# Altium PCB sensores_0v1.PcbDoc
Units mil, origin at the board's own origin, x right, y up, seen from the top; angles counter-clockwise.
Board outline 3937.01 x 3937.01 mil, 2 copper layers (Top Layer, Bottom Layer); 157 components, 106 nets, 497 pads, 123 vias.
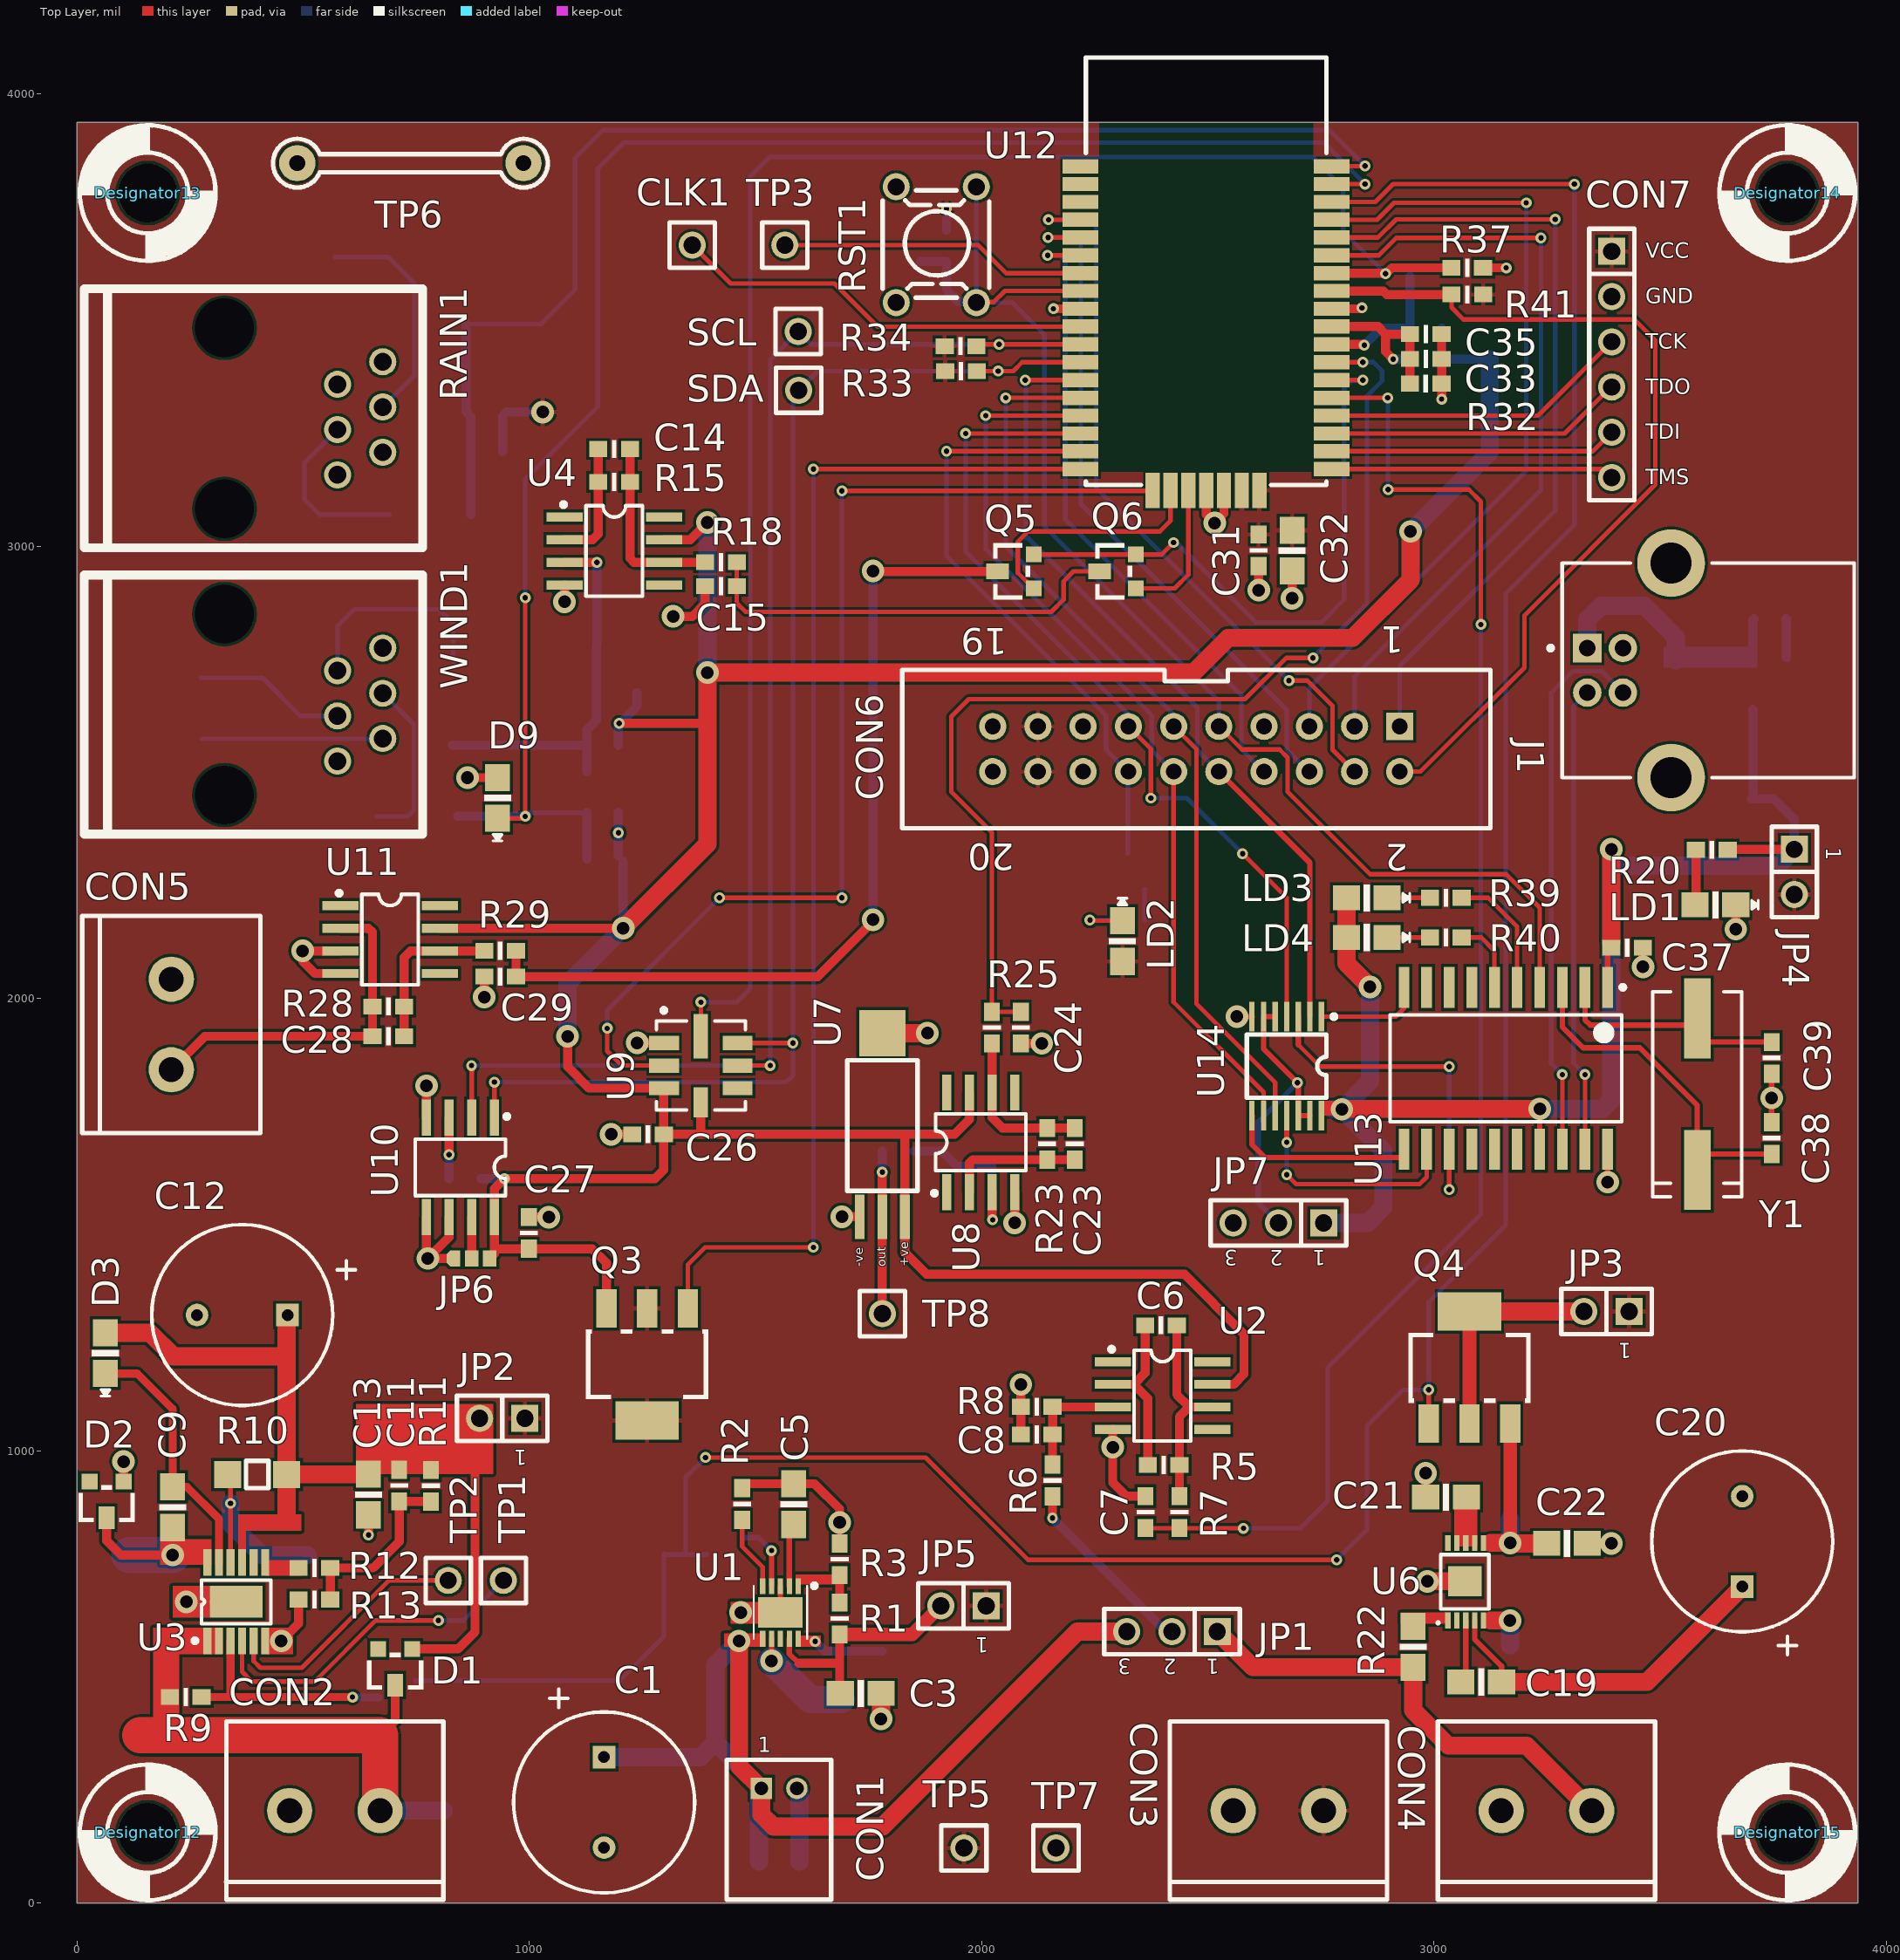
[diagram p0: Top Layer view]
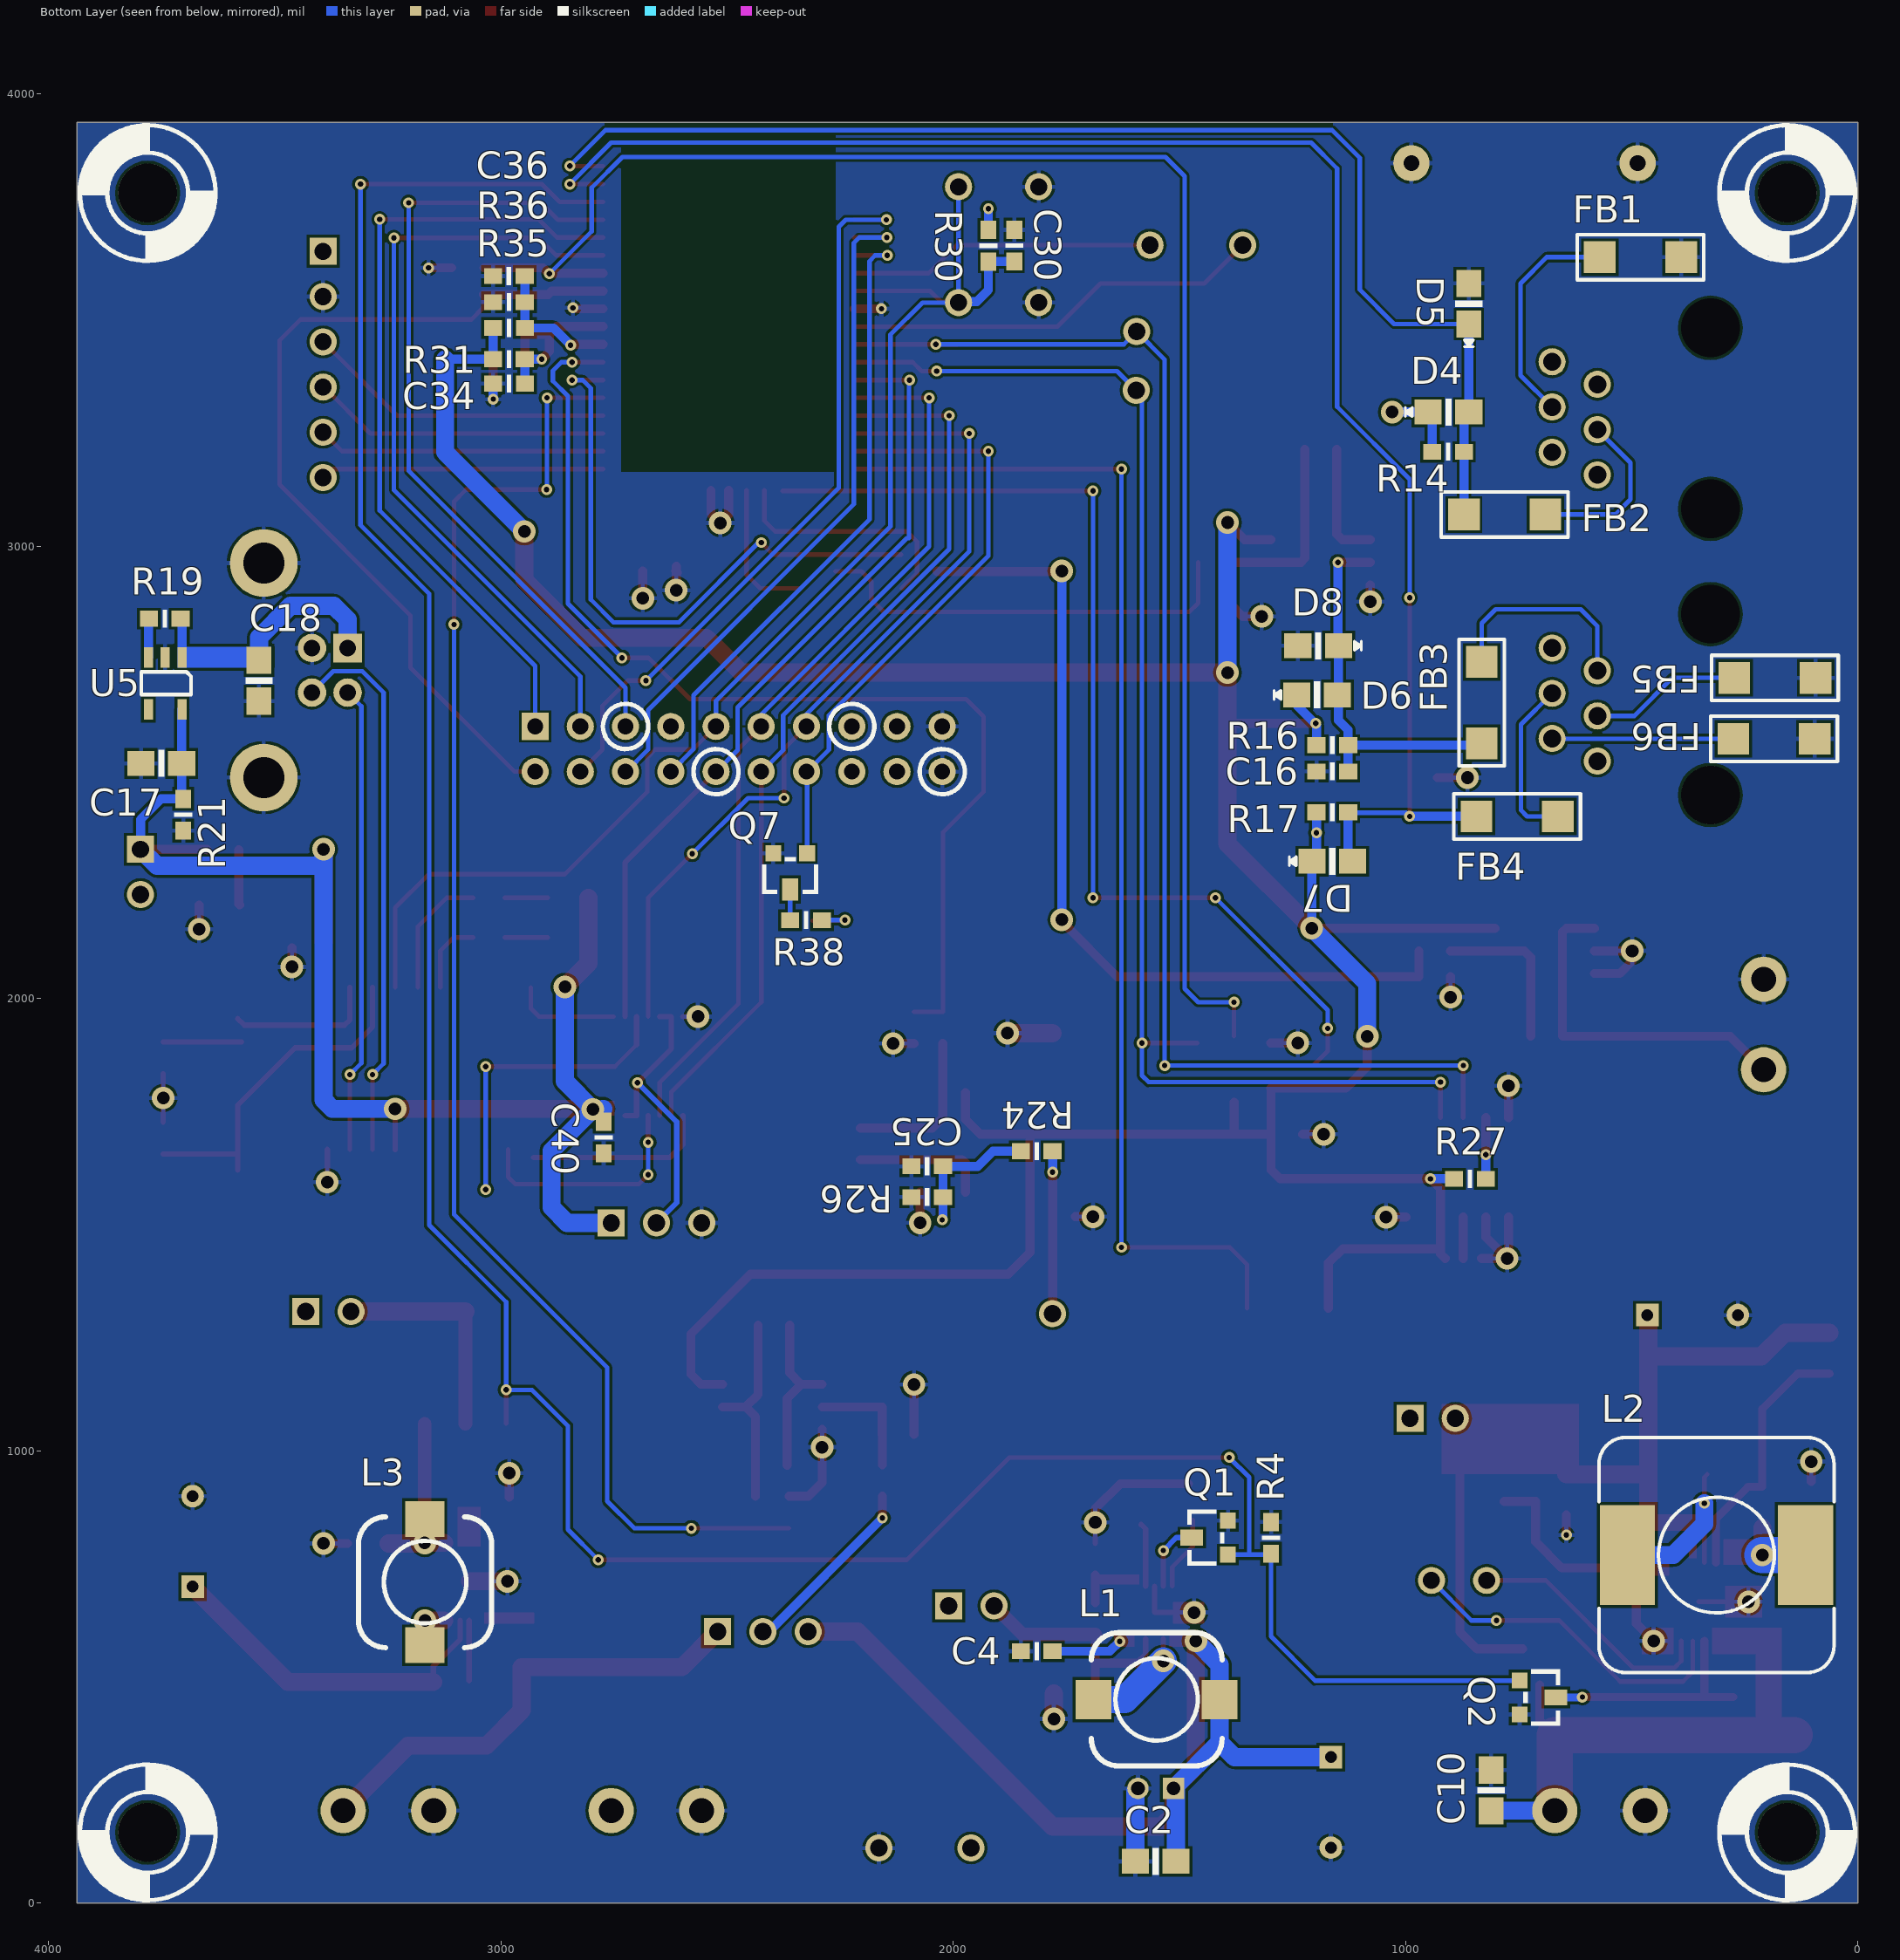
[diagram p1: Bottom Layer view, seen from below]

## Layer stack, top to bottom
Top Layer: signal copper 1.4
Dielectric: core 12.6, FR-4, Dk 4.8
Bottom Layer: signal copper 1.4

## Board outline
0,0 0,3937.01 3937.01,3937.01 3937.01,0 0,0

## Design rules (kind name [scope] priority, off if disabled: settings)
Clearance [All] p1: gap=6
HoleSize [All] p1: absolutevalues=TRUE maxlimit=100 minlimit=12 maxpercent=80.000 minpercent=20.000
PolygonConnect [All] p1: connectstyle=Relief reliefconductorwidth=10 reliefentries=4 polygonreliefangle="90 Angle"
RoutingVias [All] p1: holewidth=20 width=30 viastyle="Through Hole" minholewidth=12 minwidth=24 maxholewidth=28 maxwidth=50
SilkscreenOverComponentPads [All] p1: minsilkscreentomaskgap=10
SolderMaskExpansion [All] p1: expansion=4
Width [All] p1: maxlimit=100 minlimit=6 preferedwidth=10
26 further rules are at their usual default settings.

## Classes and differential pairs
component class U_Pressure: C26 U9
component class U_Humidity: C23 C24 C25 R23 R24 R25 R26 TP8 U7 U8
component class U_Digital: 1 C30 C31 C32 C33 C34 C35 C36 C37 C38 C39 C40 CLK1 CON6 CON7 JP7 LD2 LD3 LD4 Q5 Q6 Q7 R30 R31 R32 R33 R34 R35 R36 R37 R38 R39 R40 R41 RST1 SCL SDA TP3 U12 U13 U14 Y1
component class U_Connectors: C14 C15 C16 C17 C18 CON3 D4 D5 D6 D7 D8 D9 FB1 FB2 FB3 FB4 FB5 FB6 J1 JP2 JP3 JP4 JP5 LD1 Q3 R14 R15 R16 R17 R18 R19 R20 R21 RAIN1 TP5 TP6 TP7 U4 U5 WIND1
component class U_UV: C28 C29 CON5 R28 R29 U11
component class U_Temperature: C27 JP6 R27 U10
component class U_EnergyHarvester: C19 C20 C21 C22 CON4 L3 Q4 R22 U6
component class U_Charger: C9 C10 C11 C12 C13 CON2 D1 D2 D3 L2 Q2 R9 R10 R11 R12 R13 TP1 TP2 U3
component class U_Boost: C1 C2 C3 C4 C5 C6 C7 C8 CON1 JP1 L1 Q1 R1 R2 R3 R4 R5 R6 R7 R8 U1 U2

## Components (designator, comment, footprint, x,y, rotation, side; value= is the part's Value field where it differs from the comment)
C1 "100uF" RADIAL-5MM 1165.35,322.83 r270 top
C2 "10uF" 0805 1597.44,92.52 r180 bottom
C3 "10uF" 0805 1777.56,463.58 r180 top
C4 "1uF" 0603 1850.39,557.09 r180 bottom
C5 "10uF" 0805 1584.65,927.17 r270 top
C6 "47pF" 0603 2361.22,1277.56 r0 top
C7 "100pF" 0603 2362.2,899.61 r270 top
C8 "100nF" 0603 2086.61,1036.42 r0 top
C9 "10uF" 0805 211.61,920.28 r270 top
C10 "10uF" 0805 811.02,294.29 r270 bottom
C11 "20pF" 0603 712.6,888.23 r90 top
C12 "100uF" RADIAL-5MM 465.55,1300.2 r180 top
C13 "10uF" 0805 644.68,858.27 r90 top
C14 "47pF" 0603 1152.56,3214.57 r0 top
C15 "100pF" 0603 1388.78,2911.42 r0 top
C16 "100pF" 0603 1196.97,2501.97 r180 bottom
C17 "1uF" 0805 3795.28,2519.69 r180 bottom
C18 "4.7uF" 0805 3534.45,2657.48 r90 bottom
C19 "1uF" 0805 3059.06,489.17 r0 top
C20 "100uF" RADIAL-5MM 3681.1,699.8 r90 top
C21 "4.7uF" 0805 2981.3,897.64 r0 top
C22 "10uF" 0805 3338.58,795.28 r180 top
C23 "47pF" 0603 2205.71,1643.7 r90 top
C24 "100pF" 0603 2086.61,1900.59 r90 top
C25 "100pF" 0603 2092.52,1628.94 r180 bottom
C26 "100nF" 0603 1227.36,1699.8 r0 top
C27 "100nF" 0603 999.02,1516.73 r270 top
C28 "47pF" 0603 653.54,1916.34 r0 top
C29 "100pF" 0603 900.59,2048.23 r0 top
C30 "100nF" 0603 1864.86,3699.15 r270 bottom
C31 "100nF" 0603 2612.2,2955.71 r90 top
C32 "10uF" 0805 2686.02,2944.88 r90 top
C33 "100nF" 0603 3016.51,3413.95 r180 top
C34 "100pF" 0603 3016.73,3359.25 r180 bottom
C35 "1uF" 0603 3016.73,3468.5 r180 top
C36 "100nF" 0603 3017.07,3596.93 r180 bottom
C37 "100nF" 0603 3461.61,2112.2 r180 top
C38 "27pF" 0603 3746.06,1726.38 r270 top
C39 "27pF" 0603 3746.06,1833.66 r90 top
C40 "1uF" 0603 2772.64,1657.48 r90 bottom
CLK1 "Test Point" TERMINAL 1360.24,3665.35 r90 top
CON1 "2P" JST-2MM 1512.8,253.94 r0 top
CON2 "2P" INTERLOCK2-5MM-FIXED 670.28,204.72 r180 top
CON3 "2P" INTERLOCK2-5MM-FIXED 2755.91,204.72 r180 top
CON4 "2P" INTERLOCK2-5MM-FIXED 3348.43,204.72 r180 top
CON5 "2P" INTERLOCK2-5MM-FIXED 208.66,1842.52 r90 top
CON6 "20P" IDC-20 2924.21,2601.38 r180 top
CON7 "6P" SIP-6-JTAG 3392.72,3651.57 r270 top
D1 "BAT54" SOT-23@AK 741.14,562.01 r180 top
D2 "BAT54" SOT-23@AK 103.35,932.09 r180 top
D3 "MCL4148" 0805@DIODE 62.99,1260.83 r270 top
D4 "MCL4148" 0805@DIODE 860.24,3296.26 r0 bottom
D5 "MCL4148" 0805@DIODE 860.24,3580.71 r270 bottom
D6 "MCL4148" 0805@DIODE 1150.59,2671.26 r0 bottom
D7 "MCL4148" 0805@DIODE 1117.13,2303.15 r0 bottom
D8 "MCL4148" 0805@DIODE 1238.19,2779.53 r180 bottom
D9 "MCL4148" 0805@DIODE 930.12,2488.19 r270 top
Designator12 "Comment" NPTH-3MM 156.5,156.5 r0 top
Designator13 "Comment" NPTH-3MM 156.5,3780.51 r270 top
Designator14 "Comment" NPTH-3MM 3780.51,3780.51 r180 top
Designator15 "Comment" NPTH-3MM 3780.51,156.5 r90 top
FB1 "150Z_100MHz" 1806 390.75,3638.78 r0 bottom
FB2 "150Z_100MHz" 1806 871.06,3069.88 r180 bottom
FB3 "150Z_100MHz" 1806 831.69,2744.09 r270 bottom
FB4 "150Z_100MHz" 1806 663.39,2402.56 r0 bottom
FB5 "150Z_100MHz" 1806 273.62,2708.66 r180 bottom
FB6 "150Z_100MHz" 1806 275.59,2573.82 r180 bottom
J1 "440119-4" 440119 3377.95,2725.39 r0 top
JP1 "3P" SIP-3 2520.67,600.39 r180 top
JP2 "2P" SIP-2 990.16,1071.85 r180 top
JP3 "2P" SIP-2 3431.1,1308.04 r180 top
JP4 "2P" SIP-2 3796.26,2329.72 r270 top
JP5 "2P" SIP-2 2009.84,657.48 r180 top
JP6 "3P" SOLDER-3-0603 837.6,1425.2 r0 top
JP7 "3P" SIP-3 2755.91,1503.94 r180 top
L1 "22uH" 7X7 1550.2,450.79 r0 bottom
L2 "470uH" 12X12 312.99,769.69 r180 bottom
L3 "22uH" 7X7 3167.32,709.65 r90 bottom
LD1 "LED" 0805@DIODE 3576.77,2206.69 r0 top
LD2 "LED" 0805@DIODE 2311.02,2081.69 r90 top
LD3 "LED" 0805@DIODE 2806.1,2222.44 r0 top
LD4 "LED" 0805@DIODE 2806.1,2134.84 r0 top
Q1 "BSS138" SOT-23@GSD 1392.72,770.67 r90 bottom
Q2 "BSS138" SOT-23@GSD 748.03,492.13 r270 bottom
Q3 "ZXMP3A16G" SOT-223@GDSD 1350.39,1314.96 r180 top
Q4 "ZXMP3A16G" SOT-223@GDSD 2988.19,1060.04 r0 top
Q5 "BSS138" SOT-23@GSD 2115.16,2906.5 r90 top
Q6 "BSS138" SOT-23@GSD 2340.55,2906.5 r90 top
Q7 "BSS138" SOT-23@GSD 2322.83,2320.87 r0 bottom
R1 "1.21M" 0603 1686.02,664.37 r270 top
R2 "40.2K" 0603 1470.47,847.44 r90 top
R3 "470K" 0603 1686.02,795.28 r270 top
R4 "10K" 0603 1297.24,772.64 r90 bottom
R5 "51.1K" 0603 2367.13,968.5 r0 top
R6 "470K" 0603 2156.5,969.49 r270 top
R7 "200R" 0603 2437.01,899.61 r270 top
R8 "64.9k" 0603 2086.61,1097.44 r0 top
R9 "30K" 0603 275.59,455.71 r180 top
R10 "4R" 1206 463.58,947.83 r180 top
R11 "30K" 0603 782.48,887.8 r90 top
R12 "220K" 0603 560.04,741.14 r180 top
R13 "330K" 0603 490.16,671.26 r0 top
R14 "4.7K" 0603 871.06,3208.66 r0 bottom
R15 "51.1K" 0603 1152.56,3141.73 r0 top
R16 "470K" 0603 1126.97,2560.04 r0 bottom
R17 "4.7K" 0603 1126.97,2411.42 r0 bottom
R18 "200R" 0603 1388.78,2964.57 r0 top
R19 "2K2" 0603 3777.56,2839.57 r180 bottom
R20 "390R" 0603 3578.74,2328.74 r0 top
R21 "100K" 0603 3701.77,2371.06 r90 bottom
R22 "300" 0805 2953.74,521.65 r90 top
R23 "51.1K" 0603 2144.69,1643.7 r90 top
R24 "47K" 0603 1850.39,1662.4 r180 bottom
R25 "200R" 0603 2022.64,1900.59 r90 top
R26 "20K" 0603 2092.52,1561.02 r180 bottom
R27 "10K" 0603 822.83,1601.38 r0 bottom
R28 "51.1K" 0603 653.54,1982.28 r0 top
R29 "200R" 0603 900.59,2105.31 r0 top
R30 "100K" 0603 1922.24,3628.94 r90 bottom
R31 "20K" 0603 2946.85,3413.39 r0 bottom
R32 "10K" 0603 3016.51,3359.25 r180 top
R33 "10K" 0603 1989.17,3386.81 r180 top
R34 "10K" 0603 1988.19,3441.93 r180 top
R35 "20K" 0603 2946.73,3482.28 r0 bottom
R36 "10K" 0603 3016.85,3539.37 r180 bottom
R37 "10K" 0603 3108.27,3615.16 r180 top
R38 "470R" 0603 2360.24,2173.23 r180 bottom
R39 "470R" 0603 3061.02,2222.44 r180 top
R40 "470R" 0603 3061.02,2134.84 r180 top
R41 "10K" 0603 3038.39,3556.1 r0 top
RAIN1 "RJ25" RJ25 676.18,3407.48 r270 top
RST1 "Reset" MICROSWITCH 1811.02,3794.29 r0 top
SCL "Test Point" TERMINAL 1594.49,3474.41 r0 top
SDA "Test Point" TERMINAL 1595.47,3344.49 r0 top
TP1 "Test Point" TERMINAL 942.91,713.58 r0 top
TP2 "Test Point" TERMINAL 820.87,713.58 r0 top
TP3 "Test Point" TERMINAL 1564.96,3665.35 r0 top
TP5 "Test Point" TERMINAL 1960.63,122.05 r0 top
TP6 "Test Point" TEST-PROBE2 487.2,3846.46 r0 top
TP7 "Test Point" TERMINAL 2164.37,122.05 r0 top
TP8 "Test Point" TERMINAL 1780.51,1303.15 r90 top
U1 "LTC3105" DFN-10 1555.12,642.72 r270 top
U2 "MCP6071" SOIC-8 2399.61,1122.05 r0 top
U3 "LT3652" MSOP12@EP 352.36,666.34 r90 top
U4 "MCP6071" SOIC-8 1187.99,2989.17 r0 top
U5 "MCP1824T" SOT-23-5 3704.72,2753.94 r270 bottom
U6 "LTC3588-1" MSOP10@EP 3069.88,710.63 r90 top
U7 "HIH-5031" HIH 1730.32,1517.72 r0 top
U8 "MCP6071" SOIC-8 1998.03,1682.09 r90 top
U9 "BMP085" CLCC-8 1379.2,1851.68 r0 top
U10 "TMP175" SOIC-8 847.76,1626.68 r270 top
U11 "MCP6V26" SOIC-8 692.23,2130.27 r0 top
U12 "ATZB-24-A2" ATZB-24-A2 2496.06,3134.84 r90 top
U13 "MCP2200" SOIC-20 3158.46,1845.47 r270 top
U14 "SN74HC4066" TSSOP-14 2674.21,1850.39 r270 top
WIND1 "RJ25" RJ25 676.18,2774.61 r270 top
Y1 "12MHz" CSM-7 3581.69,1788.39 r90 top

## Footprints (in the part's own frame and the unit in brackets; to place one, negate y for a bottom-side part, rotate by r counter-clockwise, add the part's x,y. Pads: shape width x height; smd on the part's side, far side on the other; paste and mask are expansions set on the pad)
7X7 [mm] "Package 7x7mm"
  rect 2x2.2 smd: 1(-3.535,0.01) 2(3.55,0.02)
  silkscreen extent -3.67,-3.74 3.67,3.74
12X12 [mm] "Package 12x12mm"
  rect 3.1x5.6 smd: 1(-5,0) 2(5,0)
  silkscreen extent -6.6,-6.6 6.6,6.6
0603 [mil]
  rect 40x35 smd: 1(0,0) 2(70,0)
  silkscreen extent 30,-20 40,20
0805 [mil]
  rect 60x55 smd: 1(0,0) 2(90,0)
  silkscreen extent 38,-30 52,30
0805@DIODE [mil]
  rect 60x55 smd: A(0,0) K(90,0)
  silkscreen extent 38,-30 140,30
1206 [mil]
  rect 60x60 smd: 1(0,0) 2(130,0)
  silkscreen extent 40,-30 90,30
1806 [mil]
  rect 70x70 smd: 1(0,0) 2(180,0)
  silkscreen extent -50,-50 230,50
440119 [mm] "Connector; USB1.1, Type B, Thru-Hole; 4 Position; Right Angle"
  rect 1.6x1.6 hole 0.92: 1(-1,1.25)
  round 1.6 hole 0.92: 2(-1,-1.25) 3(1,-1.25) 4(1,1.25)
  round 3.8 hole 2.3: 5(3.71,6.02) 6(3.71,-6.02)
  silkscreen extent -3.18,-6.02 13.99,6.02
ATZB-24-A2 [mm] "Atmel ATZB-24-A2 footprint"
  rect 0.8x2 smd mask+0.05: 1(17.9,7.05) 2(16.9,7.05) 3(15.9,7.05) 4(14.9,7.05) 5(13.9,7.05) 6(12.9,7.05) 7(11.9,7.05) 8(10.9,7.05) 9(9.9,7.05) 10(8.9,7.05) 11(7.9,7.05) 12(6.9,7.05) 13(5.9,7.05) 14(4.9,7.05) 15(3.9,7.05) 16(2.9,7.05) 17(1.9,7.05) 18(0.9,7.05) 26(0.9,-7.05) 27(1.9,-7.05) 28(2.9,-7.05) 29(3.9,-7.05) 30(4.9,-7.05) 31(5.9,-7.05) 32(6.9,-7.05) 33(7.9,-7.05) 34(8.9,-7.05) 35(9.9,-7.05) 36(10.9,-7.05) 37(11.9,-7.05) 38(12.9,-7.05) 39(13.9,-7.05) 40(14.9,-7.05) 41(15.9,-7.05) 42(16.9,-7.05) 43(17.9,-7.05)
  rect 2x0.8 smd mask+0.05: 19(-0.3,3) 20(-0.3,2) 21(-0.3,1) 22(-0.3,0) 23(-0.3,-1) 24(-0.3,-2) 25(-0.3,-3)
  silkscreen extent 0,-6.75 24,6.75
CLCC-8 [mm]
  rect 1.67x0.8 smd: 1(-2.065,1.27) 2(-2.065,0) 3(-2.065,-1.27) 5(2.065,-1.27) 6(2.065,0) 7(2.065,1.27)
  rect 0.8x1.67 smd: 4(0,-2.065)
  rect 0.8x2.5 smd: 8(0,1.65)
  silkscreen extent -2.5,-2.5 2.5,3.22
CSM-7 [mm] "Quartz Crystal, SM; 2 Leads; Body 11.4 x 4.8 x 5 mm (LxWxH)"
  rect 4.5x1.5 smd: 1(-4.25,0) 2(4.25,0)
  silkscreen extent -5.75,-2.5 5.75,2.5
DFN-10 [mm]
  rect 0.9x0.3 smd: 1(-1.475,1) 2(-1.475,0.5) 3(-1.475,0) 4(-1.475,-0.5) 5(-1.475,-1) 6(1.475,-1) 7(1.475,-0.5) 8(1.475,0) 9(1.475,0.5) 10(1.475,1)
  rect 1.7x2.5 smd: PAD(0,0)
  silkscreen extent -1.62,-1.5 1.5,2.02
HIH [mm] "Honeywell Humidity Sensor"
  rect 0.55x2.5 smd: 1(0,0) 2(1.27,0) 3(2.54,0)
  rect 2.6x2.6 smd: PAD(1.27,10.3)
  silkscreen extent -0.7,1.45 3.25,8.77
IDC-20 [mil]
  rect 60x60 hole 35: 1(0,0)
  round 60 hole 35: 2(0,100) 3(100,0) 4(100,100) 5(200,0) 6(200,100) 7(300,0) 8(300,100) 9(400,0) 10(400,100) 11(500,0) 12(500,100) 13(600,0) 14(600,100) 15(700,0) 16(700,100) 17(800,0) 18(800,100) 19(900,0) 20(900,100)
  silkscreen extent -200,-125 1100,225
INTERLOCK2-5MM-FIXED [mil]
  round 100 hole 55: 1(0,0) 2(200,0)
  silkscreen extent -140,-197 340,197
JST-2MM [mm] "JST 2mm header side entry"
  rect 1.2x1.2 hole 0.762: 1(0,0)
  round 1.2 hole 0.762: 2(2,0)
  silkscreen extent -1.95,-6.25 3.93,1.6
MICROSWITCH [mil]
  round 60 hole 38: 1(0,0) 2(177.16,0) 3(0,-255.9) 4(177.16,-255.9)
  silkscreen extent -30,-245 206,-8
MSOP10@EP [mm] "eMSOP, 10-Leads"
  rect 0.889x0.305 smd mask+0.05: 1(-2.175,1) 2(-2.175,0.5) 3(-2.175,0) 4(-2.175,-0.5) 5(-2.175,-1) 6(2.175,-1) 7(2.175,-0.5) 8(2.175,0) 9(2.175,0.5) 10(2.175,1)
  rect 1.68x1.88 smd mask+0.05: PAD(0.025,0.05)
  silkscreen extent -2.32,-1.3 1.53,1.57
MSOP12@EP [mm]
  rect 1.5x0.45 smd: 1(-2.2,1.625) 2(-2.2,0.975) 3(-2.2,0.325) 4(-2.2,-0.325) 5(-2.2,-0.975) 6(-2.2,-1.625) 7(2.2,-1.625) 8(2.2,-0.975) 9(2.2,-0.325) 10(2.2,0.325) 11(2.2,0.975) 12(2.2,1.625)
  rect 1.8x2.95 smd paste-0.5: PAD(0,0)
  silkscreen extent -2.31,-1.95 1.22,2.45
NPTH-3MM [mil]
  round 130 hole 130 unplated: 1(0,0)
  silkscreen extent -150,-150 150,150
RADIAL-5MM [mil]
  rect 50x50 hole 26: 1(0,0)
  round 50 hole 26: 2(200,0)
  silkscreen extent -150,-200 300,200
RJ25 [mil]
  round 60 hole 39.37: 1(0,0) 2(50,-100) 3(100,0) 4(150,-100) 5(200,0) 6(250,-100)
  round 127.95 hole 129.92: ""(-75,-350) ""(325,-350)
  silkscreen extent -161,-660 411,88
SIP-2 [mil]
  rect 60x60 hole 38: 1(0,0)
  round 60 hole 38: 2(100,0)
  silkscreen extent -50,-50 150,50
SIP-3 [mil]
  rect 60x60 hole 38: 1(0,0)
  round 60 hole 38: 2(100,0) 3(200,0)
  silkscreen extent -50,-50 250,50
SIP-6-JTAG [mil] "JTAG Connector"
  rect 60x60 hole 38: 1(0,0)
  round 60 hole 38: 2(100,0) 3(200,0) 4(300,0) 5(400,0) 6(500,0)
  silkscreen extent -50,-50 550,50
SOIC-8 [mil] "Small Outline 8 leads Body Size 150mils"
  rect 80x20 smd: 1(-110,75) 2(-110,25) 3(-110,-25) 4(-110,-75) 5(110,-75) 6(110,-25) 7(110,25) 8(110,75)
  silkscreen extent -117,-100 62,107
SOIC-20 [mm] "20-Pin Plastic Wide Body Small Outline Integrated Circuit 1.27 mm Pitch, IPC Medium Density"
  rect 2.3x0.6 smd: 1(-4.55,5.715) 2(-4.55,4.445) 3(-4.55,3.175) 4(-4.55,1.905) 5(-4.55,0.635) 6(-4.55,-0.635) 7(-4.55,-1.905) 8(-4.55,-3.175) 9(-4.55,-4.445) 10(-4.55,-5.715) 11(4.55,-5.715) 12(4.55,-4.445) 13(4.55,-3.175) 14(4.55,-1.905) 15(4.55,-0.635) 16(4.55,0.635) 17(4.55,1.905) 18(4.55,3.175) 19(4.55,4.445) 20(4.55,5.715)
  silkscreen extent -4.67,-6.5 3,6.69
SOLDER-3-0603 [mil] "3 Pins Solder Jumper 0603 size"
  oct 30x35 smd: 1(-5,0)
  rect 20x35 smd: 1(0,0)
  rect 30x35 smd: 2(35,0) 3(75,0)
SOT-23-5 [mil]
  rect 45x20 smd: 1(0,0) 2(0,-37) 3(0,-74) 4(115,-74) 5(115,0)
  silkscreen extent 32,-90 82,20
SOT-23@AK [mil] "SOT-23 (1-Anode, 2-NC, 3-Cathode)"
  rect 35x35 smd: A(0,0) NC(75,0)
  rect 35x50 smd: K(37.5,80)
  silkscreen extent -25,8 100,90
SOT-23@GSD [mil] "SOT-23 (1-Gate , 2-Source, 3-Drain)"
  rect 35x50 smd: D(37.5,80)
  rect 35x35 smd: G(0,0) S(75,0)
  silkscreen extent -25,8 100,90
SOT-223@GDSD [mil] "Small Outline for FET Transistor (1-G, 2-D, 3-S, 4-D)"
  rect 140x85 smd: D(90,248)
  rect 45x85 smd: D(90,0) G(0,0) S(180,0)
  silkscreen extent -45,46 225,201
TERMINAL [mil]
  round 60 hole 37.99: 1(0,0)
  silkscreen extent -50,-50 50,50
TEST-PROBE2 [mil]
  round 80 hole 35: 1(0,0) 1(500,0)
  silkscreen extent -54,-54 554,54
TSSOP-14 [mm] "Thin Small Outline Package"
  rect 1.65x0.3 smd: 1(-2.781,1.95) 2(-2.781,1.3) 3(-2.781,0.65) 4(-2.781,0) 5(-2.781,-0.65) 6(-2.781,-1.3) 7(-2.781,-1.95) 8(2.781,-1.95) 9(2.781,-1.3) 10(2.781,-0.65) 11(2.781,0) 12(2.781,0.65) 13(2.781,1.3) 14(2.781,1.95)
  silkscreen extent -2.91,-2.24 1.78,2.77

## Part data
C1 C12 C20: library part "CAP POL", "Polarized Capacitor"
C2 C3 C4 C5 C6 C7 C8 C9 C10 C11 C13 C14 C15 C16 C17 C18 C19 C21 C22 C23 C24 C25 C26 C27 C28 C29 C30 C31 C32 C33 C34 C35 C36 C37 C38 C39 C40: library part CAP, "Capacitor"
CLK1 SCL SDA TP1 TP2 TP3 TP5 TP6 TP7 TP8: library part TEST-PROBE, "Test/Probe Point"
CON1 CON2 CON3 CON4 CON5: library part CON02, "Connector 2 pins"
CON6: library part CON20, "Connector 20 Pins"
CON7: library part CON-JTAG, "Generic JTAG Connector"
D1 D2: library part "Diode Schottky", "Small Signal Schottky Diode"
D3 D4 D5 D6 D7 D8 D9: library part Diode, "Vishay Standard Avalanche Sinterglass Diode"
FB1 FB2 FB3 FB4 FB5 FB6: library part FERRITE-BEAD-AXIAL, "Ferrite bead"
J1: "USB 1.1, Right Angle, Thru-Hole, B Type, Receptacle, 4 Position, Black"
JP1 JP7: library part JMP3, "3-Jumper"
JP2 JP3 JP4 JP5: library part JMP2, "2-pin Jumper"
JP6: library part SOLDER3, "Solder Jumper 3 positions"
L1 L2 L3: library part IND, "Inductor"
LD1 LD2 LD3 LD4: "Light emitting diode"
Q1 Q2 Q5 Q6 Q7: library part MOSFET-N, "N-Channel Logic Level Enhancement Mode Field Effect Transistor"
Q3 Q4: library part MOSFET-P, "P-Channel Logic Level Enhancement Mode Field Effect Transistor"
R1 R2 R3 R4 R5 R6 R7 R8 R9 R10 R11 R12 R13 R14 R15 R16 R17 R18 R19 R20 R21 R22 R23 R24 R25 R26 R27 R28 R29 R30 R31 R32 R33 R34 R35 R36 R37 R38 R39 R40 R41: library part RES, "Resistor"
RAIN1 WIND1: "RJ25 Connector"
RST1: library part SW1, "Switch Push Button"
U1: "400mA Step-Up DCDC Converter With MPPC and 250mV Start-Up"
U2 U4 U8: library part MCP6V26, "Low-Offset Opamp"
U3: "Power Tracking 2A Battery Charger for Solar Power"
U5: "300 mA, Low Voltage, Low Quiescent Current LDO Regulator, 5-Pin SOT-23, Extended Temperature, Tape and Reel"
U6: "Energy harvester"
U7: "Low Voltage Humidity Sensor"
U9: "Digital Pressure Sensor"
U10: "Digital Temperature Sensor"
U11: "Low-Offset Opamp"
U12: "Zigbee Module"
U13: "USB to Serial interface"
U14: library part MAX4751, "4 analog switch (normally open)"
Y1: library part "Crystal Oscillator", "Crystal Oscillator"

## Via types
v1: diameter 24, hole 12, Top Layer to Bottom Layer, 73 vias
v2: diameter 50, hole 28, Top Layer to Bottom Layer, 50 vias

## Nets (pads, with @x,y where several pads share a name; then routed paths per layer and width w, separated by ;. In a path a pad name is that pad's centre, name@x,y a point inside that pad or via, vN(x,y) a via of type N, cw(c..) or ccw(c..) an arc to the next point about the centre after c; other vN are vias at no path point)
1WR: CON6.2 R41.1 U12.36 | length 1991.5
  Top Layer w10: CON6.2 2969.88,2501.38 3199.8,2731.3 3199.8,2846.46 3489.17,3135.83 3489.17,3454.72 3442.91,3500.98 3064.96,3500.98 3038.39,3527.56 R41.1
  Top Layer w20: U12.36 2887.8,3563.98 2895.67,3556.1 R41.1@3038.27,3556.1
AT_/CTS: CON6.13 U12.16 U14.4 | length 1882.2
  Top Layer w10: v1(1964.57,3249.02) U12.16 ; CON6.13 2374.02,2551.57 v1(2374.02,2442.91) ; v1(2576.77,2319.88) 2674.21,2222.44 U14.4
  Bottom Layer w10: v1(1964.57,3249.02) 1964.57,2988.19 2322.83,2629.92 CON6.13@2322.83,2602.36 ; v1(2374.02,2442.91) 2453.74,2442.91 v1(2576.77,2319.88)
AT_/RTS: CON6.12 U12.15 U14.9 | length 2011.1
  Top Layer w10: v1(2008.86,3288.39) U12.15 ; CON6.12 2424.21,1992.13 2623.03,1793.31 U14.9
  Bottom Layer w10: v1(2008.86,3288.39) 2008.86,2993.11 2375.98,2625.98 2375.98,2548.62 CON6.12@2423.23,2501.38
AT_RX: CON6.11 U12.14 U14.10 | length 1998.9
  Top Layer w10: v1(2053.15,3327.76) U12.14 ; CON6.11 2474.41,2551.18 2474.41,1988.19 2648.62,1813.98 U14.10
  Bottom Layer w10: v1(2053.15,3327.76) 2053.15,2999.02 2424.21,2627.95 CON6.11
AT_TX: CON6.10 U12.13 U14.2 | length 1786.8
  Top Layer w10: v1@2097.44,3367.13 U12.13
  Top Layer w12: CON6.10 2725.39,2300.2 U14.2
  Bottom Layer w10: 2097.44,3017.72 v1@2097.44,3367.13 ; 2102.36,3017.72 2441.93,2678.15 2476.38,2643.7 2476.38,2548.82 CON6.10@2524.21,2500.98
  other v1: 2096.46,3367.13
CHRGZ: TP1.1 U3.4 | length 747.2
  Top Layer w10: U3.4 365.16,511.81 386.81,490.16 525.59,490.16 660.43,625 v1(799.21,625)
  Bottom Layer w10: v1(799.21,625) 854.33,625 TP1.1
FAULTZ: TP2.1 U3.5 | length 560.4
  Top Layer w10: U3.5 390.75,535.43 405.51,520.67 497.05,520.67 689.96,713.58 TP2.1
GND: C1.2 C2.1 C3.1 C4.1 C5.1 C7.1 C8.1 C10.1 C12.2 C13.1 C15.1 C16.1 C17.1 C18.1 C20.2 C21.1 C22.1 C24.1 C25.1 C26.1 C27.1 C29.1 C30.1 C31.1 C32.1 C33.1 C34.1 C35.1 C36.1 C37.1 C38.1 C39.1 C40.1 CON1.2 CON2.2 CON3.2 CON4.2 CON5.2 CON6.19 CON6.20 CON7.2 D2.A D5.A D8.A D9.A FB1.1 FB5.2 FB6.2 J1.4 J1.5 J1.6 JP6.1 JP7.3 LD1.K Q1.S Q2.S Q7.S R2.2 R3.1 R4.2 R8.1 R13.1 R21.1 R26.1 R32.1 R36.1 R37.1 RST1.1 RST1.3 TP6.1 TP7.1 U1.3 U1.PAD U2.4 U3.6 U3.PAD U4.4 U5.2 U6.PAD U7.1 U7.PAD U8.4 U9.1 U10.4 U10.5 U10.6 U11.3 U11.4 U12.9 U12.22 U12.23 U12.35 U13.20 U14.7 | length 3663.4
  Top Layer w10: v2(242.13,666.34) U3.PAD ; U3.6 v2(451.77,579.72)
  Top Layer w12: v2(1467.52,642.72) U1.PAD U1.3 ; R3.1 v2(1686.02,841.65) ; v2(2564.22,1959.89) U14.7 ; v2(3383.46,1593.9) U13.20 ; C38.1 C39.1
  Top Layer w20: D2.A v2(103.35,976.38) ; v2(451.77,579.72) 490.16,618.11 R13.1 ; U11.4 526.57,2055.27 499.18,2082.66 v2(499.18,2105.27) U11.3 ; v1(644.68,813.98) C13.1 ; U10.5 772.76,1428.03 v2(775.59,1425.2) ; U10.4 v2(772.76,1806.96) ; U10.6 822.76,1472.37 v2(775.59,1425.2) ; JP6.1@832.6,1425.2 v2(775.59,1425.2) ; v2(863.39,2488.19) D9.A ; v2(900.59,2003.08) C29.1 ; C27.1 v2(1043.31,1516.73) ; v2(1077.99,2876.97) U4.4 ; v2(1181.1,1699.8) C26.1 ; v2(1238.29,1901.68) U9.1 ; v2(1317.91,2844.49) 1360.24,2844.49 1388.78,2873.03 C15.1 ; R2.2@1480.2,927.17 C5.1 1630.91,927.17 1686.02,872.05 v2(1686.02,841.65) ; v2(1690.95,1517.72) U7.1 ; v2(2073.03,1504.13) U8.4 ; C8.1 R8.1 v2(2086.61,1146.65) ; C24.1 v2(2132.87,1900.59) ; v1(2158.57,3524.78) 2158.74,3524.61 U12.9 ; U2.4 v2(2289.61,1008.11) 2289.61,929.88 2319.88,899.61 C7.1 ; U12.22 2496.06,3069.88 v2(2514.76,3051.18) 2535.43,3071.85 U12.23 ; C31.1@2610.24,2941.93 C31.1@2612.2,2943.9 ; v2(2612.2,2902.56) C31.1@2612.2,2943.9 ; C31.1 C31.1@2612.2,2943.9 ; C31.1@2613.19,2944.88 C31.1@2612.2,2943.9 ; v2(2686.02,2884.84) C32.1 ; U12.35 2838.55,3524.61 v1(2840.69,3526.75) ; C21.1 v2(2981.3,950.79) ; C35.1@3015.75,3469.49 3016.51,3468.72 C33.1 ; C33.1@3016.51,3413.39 3016.73,3413.17 v1(3016.73,3324.8) ; R37.1 v1(3159.45,3615.16) ; C22.1 v2(3391.73,795.28) ; v2(3461.61,2069.88) C37.1 ; v2(3666.77,2153.11) LD1.K
  Top Layer w40: v2(1777.56,407.48) C3.1 ; U7.PAD v2(1879.92,1923.23) ; v2(2985.24,711.61) U6.PAD
  Bottom Layer w20: C2.1@1591.54,98.43 C2.1 ; v1@2840.69,3526.44 v1(2840.69,3526.75) ; v1(3016.73,3324.8) C34.1
  Bottom Layer w40: C2.1 CON1.2@1597.44,248.03
  other v2: 3746.06,1780.02
GPIO0: CON6.4 U12.4 | length 1647.7
  Top Layer w10: v1(2147.64,3721.46) U12.4 ; v1(2679.13,2702.76) 2719.49,2702.76 2775.59,2646.65 2775.59,2549.61 CON6.4@2824.21,2500.98
  Bottom Layer w10: v1(2147.64,3721.46) 2237.2,3721.46 2252.95,3705.71 2252.95,3128.94 v1(2679.13,2702.76)
GPIO1: CON6.6 U12.5 | length 1529
  Top Layer w10: v1(2146.65,3682.09) U12.5
  Bottom Layer w10: v1(2146.65,3682.09) 2207.68,3682.09 2219.49,3670.28 2219.49,3092.52 2674.21,2637.8 2674.21,2550.2 CON6.6@2724.41,2500
GPIO2: CON6.8 U12.6 | length 1428.4
  Top Layer w10: v1(2145.67,3642.72) U12.6
  Bottom Layer w10: v1(2145.67,3642.72) 2172.24,3642.72 2185.04,3629.92 2185.04,3059.06 2573.82,2670.28 2573.82,2551.38 CON6.8@2624.21,2500.98
GPIO4: Q5.G U12.20 | length 541.3
  Top Layer w10: Q5.G@2114.17,2906.5 2079.72,2940.94 2079.72,3009.84 2102.36,3032.48 2393.7,3032.48 2417.32,3056.1 U12.20
GPIO5: Q6.G U12.21 | length 314.8
  Top Layer w10: Q6.G 2426.18,2906.5 2456.69,2937.01 U12.21
GPIO6: CON6.14 Q7.G U12.17 | length 1351.5
  Top Layer w10: v1(1922.24,3209.65) U12.17
  Bottom Layer w10: v1(1922.24,3209.65) 1922.24,2978.35 2274.61,2625.98 2274.61,2549.61 CON6.14@2322.83,2501.38 ; Q7.G 2322.83,2500 CON6.14
GPIO7: CON6.16
JTAG_TCK: CON7.3 U12.29 | length 687.8
  Top Layer w10: U12.29 3229.33,3288.39 3392.72,3451.77 CON7.3@3392.72,3450.79
JTAG_TDI: CON7.5 U12.27 | length 636.5
  Top Layer w10: U12.27 3350.79,3209.65 CON7.5
JTAG_TDO: CON7.4 U12.28 | length 660.8
  Top Layer w10: U12.28 3288.27,3249.02 CON7.4@3391.61,3352.36
JTAG_TMS: CON7.6 U12.26 | length 626.7
  Top Layer w10: U12.26 3371.06,3170.28 CON7.6@3391.73,3149.61
NetC4_2: C4.2 U1.10 | length 157.5
  Bottom Layer w20: v1(1631.89,578.74) 1653.54,557.09 C4.2
NetC5_2: C5.2 U1.2 | length 140.5
  Top Layer w12: U1.2 1574.8,827.32 C5.2
NetC6_1: C6.1 R5.1 U2.2 | length 378.8
  Top Layer w20: U2.2 2336.02,1147.05 ; C6.1 2361.22,1172.24 2336.02,1147.05 ; R5.1 2367.13,1115.94 2336.02,1147.05
NetC6_2: C6.2 R5.2 R7.1 U2.6 | length 449.2
  Top Layer w20: C6.2 2431.22,1124.88 2459.06,1097.05 ; R7.1 2437.01,1075 2459.06,1097.05 ; U2.6 2459.06,1097.05
NetC7_2: C7.2 R7.2 U12.30 | length 3319
  Top Layer w10: C7.2@2363.07,828.74 v1(2578.74,828.74) ; U12.30 v1(2897.64,3327.76) ; v1(2898.62,3125) 3076.77,3125 3103.35,3098.43 v1(3103.35,2826.77)
  Bottom Layer w10: v1(2578.74,828.74) 2704.72,828.74 2764.76,888.78 2764.76,1184.06 3103.35,1522.64 v1(3103.35,2826.77) ; v1@2897.64,3125 v1(2897.64,3327.76)
NetC8_2: C8.2 R6.1 R8.2 U2.3 | length 259.6
  Top Layer w20: R6.1 C8.2@2156.5,1036.3 ; C8.2@2157.01,1036.81 2157.01,1097.05 U2.3
NetC9_1: C9.1 D3.K U3.11 | length 581.5
  Top Layer w17.72: D3.K 133.31,1170.83 211.61,1092.52 C9.1 243.11,920.28 313.98,849.41 U3.11
NetC9_2: C9.2 D2.K L2.2 U3.12 | length 365.7
  Top Layer w20: D2.K 65.85,801.28 97.44,769.69 v2(211.61,769.69)
  Top Layer w40: v2(211.61,769.69) C9.2
  Bottom Layer w80: L2.2 v2(211.61,769.69)
NetC11_1: C11.1 R11.1 R12.1 R13.2 | length 405.5
  Top Layer w20: R12.1 654.53,741.14 712.6,799.21 C11.1 782.05,888.23 R11.1 ; R13.2 R12.1@560.16,741.02
NetC14_1: C14.1 R15.1 U4.2 | length 266.7
  Top Layer w20: U4.2 1140.16,3014.17 1152.56,3026.57 C14.1@1152.56,3213.58
NetC14_2: C14.2 R15.2 R18.1 U4.6 | length 410.4
  Top Layer w20: C14.2@1222.56,3213.58 R15.2 1222.56,2973.31 1231.69,2964.17 U4.6 1388.39,2964.17 R18.1
NetC15_2: C15.2 Q6.D R18.2 | length 961.4
  Top Layer w10: R18.2@1458.66,2964.57 1458.66,2874.02 1478.35,2854.33 2153.54,2854.33 2181.1,2881.89 2181.1,2922.24 2202.85,2944 Q6.D
NetC16_2: C16.2 D6.A D8.K FB3.2 R16.1 U4.3 | length 837.6
  Top Layer w20: U4.3 v1(1149.61,2964.17)
  Bottom Layer w20: FB3.2@830.59,2560.04 R16.1 ; C16.2 R16.1 ; D8.K 1148.19,2676.18 1148.19,2614.72 1126.97,2593.5 R16.1 ; D8.K@1149.61,2780.94 v1(1149.61,2964.17)
NetC19_1: C19.1 U6.3 | length 132.9
  Top Layer w12: C19.1@3069.88,492.13 U6.3
NetC19_2: C19.2 C20.1 U6.4 | length 779.8
  Top Layer w12: U6.4 3089.57,583.66 3149.06,524.17 C19.2
  Top Layer w40: C19.2 3470.47,489.17 C20.1
NetC21_2: C21.2 U6.7 U6.8 U6.9
NetC22_2: C22.2 L3.2 Q4.S U6.6 | length 438.8
  Top Layer w30: v2@3168.19,796.54 Q4.S
  Top Layer w40: 3125.2,796.46 v2(3168.11,796.46) v2@3168.19,796.54 ; v2@3169.29,795.28 C22.2
  Bottom Layer w40: v2(3168.11,796.46) L3.2
NetC23_1: C23.1 R23.1 U8.2 | length 300
  Top Layer w20: U8.2 1973.03,1636.42 1980.32,1643.7 R23.1 C23.1
NetC23_2: C23.2 R23.2 R25.1 U8.6 | length 355.6
  Top Layer w20: R25.1@2023.03,1900.2 U8.6 2023.03,1736.81 2046.14,1713.7 R23.2 C23.2
NetC24_2: C24.2 R25.2 U12.32 | length 2423.3
  Top Layer w10: C24.2 R25.2 2022.64,2367.13 1933.07,2456.69 1933.07,2623.03 1971.46,2661.42 2581.69,2661.42 2673.23,2752.95 v1(2732.28,2752.95) ; U12.32 v1(2842.52,3406.5)
  Bottom Layer w10: v1@2731.79,2753.44 2851.38,2873.03 2851.38,3331.69 2884.84,3365.16 2884.84,3387.8 2866.14,3406.5 v1(2842.52,3406.5)
NetC25_2: C25.2 R24.1 R26.2 U8.3 | length 366.1
  Top Layer w20: v1@2023.03,1510.83 U8.3
  Bottom Layer w20: R24.1 1912.4,1662.4 1945.87,1628.94 C25.2 R26.2 2022.52,1512.52 v1(2024.21,1510.83)
NetC28_1: C28.1 CON5.1 R28.1 U11.2 | length 780.4
  Top Layer w20: CON5.1 282.48,1916.34 C28.1 R28.1 653.54,2146.17 644.44,2155.27 U11.2
NetC28_2: C28.2 R28.2 R29.1 U11.6 | length 357.4
  Top Layer w20: C28.2 R28.2 723.54,2090.67 738.14,2105.27 U11.6 R29.1@900.54,2105.27
NetC29_2: C29.2 Q5.D R29.2 | length 1944.5
  Top Layer w20: R29.2 C29.2 1637.8,2048.23 v2@1759.84,2170.28 ; v2(1759.84,2944.88) 1760.73,2944 Q5.D Q5.D@2034.27,2944.88
  Bottom Layer w20: v2(1759.84,2174.21) v2(1759.84,2944.88)
NetC33_2: C33.2 C34.2 C35.2 R31.1 R32.2 U12.34 | length 446
  Top Layer w20: U12.34 2875.98,3485.24 2892.72,3468.5 ; 2892.72,3469.49 2892.72,3468.5 ; v1(2909.45,3413.39) 2892.72,3430.12 2892.72,3468.5 ; R32.2 C33.2 C33.2@2946.73,3415.35 ; C35.2@2946.85,3468.5 C35.2 ; 2892.72,3468.5 C35.2 ; C33.2@2946.73,3415.35 2946.51,3415.14 2946.51,3414.37 2946.73,3414.59 C33.2@2946.73,3415.35 ; C33.2@2946.73,3415.35 C35.2
  Bottom Layer w20: v1(2909.45,3413.39) R31.1 C34.2@2946.85,3359.37
NetC36_2: C36.2 R35.1 R36.2 U12.33 | length 304.2
  Top Layer w20: U12.33 2843.81,3445.87 v1(2845.61,3444.07)
  Bottom Layer w20: v1@2845.47,3444.2 v1(2845.61,3444.07) 2883.83,3482.28 R35.1 2946.73,3596.12 C36.2@2947.07,3596.46
NetC38_2: C38.2 U13.3 Y1.1 | length 761.6
  Top Layer w12: U13.3 3283.46,1937.01 3329.72,1890.75 3454.72,1890.75 3581.69,1763.78 Y1.1 ; Y1.1@3584.76,1656.38 C38.2
NetC39_2: C39.2 U13.2 Y1.2 | length 504.2
  Top Layer w12: U13.2 3333.46,1952.95 3345.47,1940.94 3566.93,1940.94 Y1.2 ; Y1.2@3572.83,1903.66 C39.2
NetCLK1_1: CLK1.1 U12.10 | length 932.9
  Top Layer w10: CLK1.1 1444.88,3580.71 1674.21,3580.71 1769.69,3485.24 U12.10
NetD4_A: D4.A D5.K FB2.1 R14.1 U12.43 | length 2865.7
  Top Layer w10: U12.43 v1@2847.44,3839.57
  Bottom Layer w10: D4.A@860.24,3303.15 D4.A@864.17,3299.21 ; D5.K@860.24,3491.14 1025.59,3491.14 1101.38,3566.93 1101.38,3858.27 1162.4,3919.29 2768.7,3919.29 v1(2847.44,3840.55)
  Bottom Layer w20: D4.A@860.24,3303.15 D5.K D5.K@860.24,3491.14 ; D4.A@861.22,3296.26 871.06,3286.42 R14.1 FB2.1
NetD7_A: D7.A D9.K FB4.2 R17.1 U12.42 | length 3787.9
  Top Layer w10: D9.K 986.77,2398.19 v1(991.14,2402.56) v1(991.14,2885.83) ; U12.42 v1(2847.44,3800.2)
  Bottom Layer w10: v1(991.14,2402.56) 999.02,2410.43 R17.1@1126.97,2410.43 ; v1(991.14,2885.83) 991.14,3147.64 1151.57,3308.07 1151.57,3834.65 1208.66,3891.73 2755.91,3891.73 v1(2847.44,3800.2) ; D7.A@1126.97,2308.07 D7.A@1129.92,2305.12
  Bottom Layer w20: FB4.2@841.54,2402.56 v1(991.14,2402.56) ; D7.A@1126.97,2308.07 R17.1@1126.97,2410.43
NetFB1_2: FB1.2 RAIN1.3 | length 501.5
  Bottom Layer w10: FB1.2 687.99,3638.78 746.06,3580.71 746.06,3377.36 RAIN1.3
NetFB2_2: FB2.2 RAIN1.4 | length 386.4
  Bottom Layer w10: RAIN1.4 502.95,3184.25 502.95,3103.35 536.42,3069.88 FB2.2
NetFB3_1: FB3.1 WIND1.2 | length 467.7
  Bottom Layer w10: WIND1.2 576.18,2823.23 613.19,2860.24 801.18,2860.24 831.69,2829.72 FB3.1
NetFB4_1: FB4.1 WIND1.3 | length 374.2
  Bottom Layer w10: FB4.1 731.3,2402.56 745.08,2416.34 745.08,2605.71 WIND1.3
NetFB5_1: FB5.1 WIND1.4 | length 337.4
  Bottom Layer w10: FB5.1 410.43,2708.66 494.49,2624.61 WIND1.4
NetFB6_1: FB6.1 WIND1.5 | length 399.8
  Bottom Layer w10: FB6.1 WIND1.5@675.39,2573.82
NetJ1_2: J1.2 U13.19 | length 1033
  Top Layer w10: U13.19 v1(3333.46,1831.69)
  Bottom Layer w10: v1(3333.46,1831.69) 3308.07,1857.09 3308.07,2645.67 J1.2
NetJ1_3: J1.3 U13.18 | length 1217.6
  Top Layer w10: U13.18 v1(3283.46,1831.69)
  Bottom Layer w10: v1(3283.46,1831.69) 3258.86,1856.3 3258.86,2676.18 3306.1,2723.43 3370.08,2723.43 J1.3
NetJP1_2: JP1.2 R6.2 | length 403.1
  Top Layer w20: v1(2156.5,851.38) R6.2
  Bottom Layer w20: v1(2156.5,851.38) JP1.2@2407.48,600.39
NetJP6_2: JP6.2 U10.7 | length 91.3
  Top Layer w20: JP6.2@872.76,1425.36 U10.7
NetJP7_2: JP7.2 U14.5 U14.6 U14.12 U14.13 | length 666.4
  Top Layer w12: U14.5 U14.6 2623.03,1888.78 v1(2697.83,1813.98) 2699.8,1812.01 U14.12 U14.13
  Bottom Layer w12: JP7.2 2611.22,1548.62 2611.22,1727.36 v1(2697.83,1813.98)
NetL1_2: L1.2 U1.7 | length 239.1
  Top Layer w12: v2(1535.43,535.43) U1.7
  Bottom Layer w60: v2(1535.43,535.43) 1620.87,450 L1.2
NetL2_1: L2.1 R10.2 U3.10 | length 441.4
  Top Layer w10: R10.2 339.57,941.85 v1(339.57,883.86) U3.10
  Bottom Layer w40: v1(339.57,883.86) 339.57,838.68 408.56,769.69 L2.1
NetL3_1: L3.1 U6.5 | length 97
  Top Layer w40: 3125,625 3167.32,625 v2(3167.72,624.61)
  Bottom Layer w40: L3.1 v2(3167.72,624.61)
NetLD1_A: LD1.A R20.1 | length 122.9
  Top Layer w20: LD1.A 3578.74,2208.66 R20.1
NetLD2_K: LD2.K R38.2 | length 123.5
  Top Layer w10: v1(2239.17,2173.23) 2240.71,2171.69 LD2.K
  Bottom Layer w10: v1(2239.17,2173.23) R38.2
NetLD3_K: LD3.K R39.2 | length 94.9
  Top Layer w10: LD3.K R39.2
NetLD4_K: LD4.K R40.2 | length 94.9
  Top Layer w10: LD4.K R40.2
NetQ1_D: Q1.D U1.4 | length 153.3
  Top Layer w11.81: U1.4 v1(1535.43,779.53)
  Bottom Layer w11.81: Q1.D 1506.79,808.17 v1(1535.43,779.53)
NetQ3_G: Q3.G U12.18 | length 2701.1
  Top Layer w10: Q3.G 1350.39,1411.74 1388.46,1449.8 v1(1627.95,1449.8) ; v1(1627.95,3170.28) U12.18
  Bottom Layer w10: v1(1627.95,1449.8) v1(1627.95,3170.28)
NetQ7_D: Q7.D R38.1 | length 67.7
  Bottom Layer w10: R38.1 2360.24,2240.77 Q7.D
NetR1_1: R1.1 R3.2 U1.1 | length 60.9
  Top Layer w20: R1.1 R3.2
NetR2_1: R2.1 U1.5 | length 165.4
  Top Layer w10: R2.1 1470.47,788.39 1515.75,743.11 U1.5
NetR12_2: R12.2 U3.7
NetR19_1: R19.1 U5.3 | length 86.1
  Bottom Layer w20: R19.1 3778.72,2838.4 U5.3
NetR22_2: R22.2 U6.1
NetR24_2: R24.2 TP8.1 U7.2 | length 359.3
  Top Layer w20: TP8.1@1780.32,1303.35 U7.2 v1(1780.32,1615.94)
  Bottom Layer w20: v1(1780.32,1615.94) 1780.32,1662.32 R24.2 R24.2@1780.51,1662.28
NetR27_1: R27.1 U10.3 | length 135.2
  Top Layer w20: v1(822.76,1654.6) U10.3
  Bottom Layer w20: R27.1 v1@822.83,1654.53
NetTP3_1: TP3.1 U12.7 | length 679.2
  Top Layer w10: TP3.1 1992.13,3665.35 2054.13,3603.35 U12.7
NetU9_2: U9.2 U12.19 | length 2436.6
  Top Layer w10: v1(1172.24,1934.06) 1172.24,1883.86 1204.42,1851.68 U9.2 ; v1(1420.28,2222.44) v1(1690.94,2222.44) ; v1(1690.94,3122.05) U12.19@2376.97,3122.05
  Bottom Layer w10: v1(1172.24,1934.06) 1172.24,1974.41 v1(1420.28,2222.44) ; v1(1690.94,2222.44) v1(1690.94,3122.05)
PRESSURE_CLRZ: R37.2 U9.8 U12.37 | length 3846.9
  Top Layer w10: U9.8 v1(1379.2,1991.87)
  Top Layer w20: U12.37 2894.68,3603.35 2906.5,3615.16 R37.2@3037.4,3615.16
  Bottom Layer w10: v1(1379.2,1991.87) 1458.4,1991.87 1488.19,2021.65 1488.19,3817.91 1530.51,3860.24 2731.3,3860.24 2799.21,3792.32 2799.21,3695.87 v1(2892.72,3602.36)
RSTZ: C30.2 CON6.9 R30.1 RST1.2 RST1.4 U12.8 U13.4 | length 2995.8
  Top Layer w10: RST1.4@1988.19,3539.37 2026.57,3539.37 2051.18,3563.98 U12.8 ; RST1.2 RST1.2@1988.19,3795.28 ; CON6.9 2575.39,2550.2 2658.46,2550.2 2676.18,2532.48 2676.18,2456.69 2858.27,2274.61 3159.45,2274.61 3233.46,2200.59 U13.4
  Bottom Layer w10: RST1.2 1988.19,3540.35 RST1.4 2067.91,3538.39 2138.78,3467.52 2138.78,3043.31 2524.21,2657.87 CON6.9
  Bottom Layer w20: C30.2 1922.03,3629.15 R30.1 1922.24,3565.95 1947.83,3540.35 RST1.4@1988.19,3540.35
RX232: R40.1 U13.6 | length 165.6
  Top Layer w10: R40.1 3104.33,2134.84 3133.46,2105.71 U13.6
SCL: R34.1 SCL.1 U9.6 U10.2 U12.11 | length 3177.2
  Top Layer w10: U10.2 v1@872.76,1851.26 ; U9.6 v1(1532.48,1851.68) ; R34.1@1992.13,3445.87 v1(2038.39,3445.87) U12.11
  Bottom Layer w10: v1(872.35,1851.68) v1(1532.48,1851.68) 1532.48,3412.4 SCL.1 1623.03,3445.87 v1(2038.39,3445.87)
SDA: R33.1 SDA.1 U9.7 U10.1 U12.12 | length 3082.5
  Top Layer w10: U10.1 v1(922.76,1814.96) ; U9.7 v1(1582.68,1901.68) ; R33.1 v1(2036.42,3386.81) 2069.88,3386.81 2089.57,3406.5 U12.12
  Bottom Layer w10: v1(922.76,1814.96) 1567.91,1814.96 1582.68,1829.72 v1(1582.68,1901.68) 1582.68,3331.69 SDA.1 1637.8,3386.81 v1(2036.42,3386.81)
SER_/CTS: U13.13 U14.3 | length 776.1
  Top Layer w10: 2699.8,1897.64 2748.03,1849.41 v1(3033.46,1849.41) ; v1(3033.46,1577.76) U13.13
  Top Layer w12: 2699.8,1897.64 U14.3
  Bottom Layer w10: v1(3033.46,1577.76) v1(3033.46,1849.41)
SER_/RTS: U13.11 U14.8 | length 405.3
  Top Layer w12: U14.8 2597.44,1677.17 2625.98,1648.62 U13.11@2927.17,1648.62
SER_RX: U13.12 U14.11 | length 516
  Top Layer w10: v1(2674.21,1610.24) 2694.88,1589.57 2967.72,1589.57 2983.46,1605.32 U13.12
  Top Layer w12: v1(2674.21,1682.09) U14.11
  Bottom Layer w10: v1(2674.21,1610.24) v1(2674.21,1682.09)
SER_TX: U13.10 U14.1 | length 236.6
  Top Layer w10: U14.1 2915.35,1959.89 2933.46,1978 U13.10
SHDN: Q1.G Q2.G Q4.G R4.1 U12.41 | length 6510.1
  Top Layer w10: v1(1389.76,985.24) 1875.98,985.24 2102.36,758.86 v1(2784.45,758.86) ; U12.41 2870.08,3760.83 2909.45,3800.2 v1(3310.04,3800.2) ; Q4.G v1(2988.19,1134.84)
  Bottom Layer w10: Q2.G 1199.8,492.13 1297.24,589.57 R4.1 1299.21,770.67 1345.96,770.67 ; v1(1389.76,985.24) 1345.96,941.44 1345.96,770.67 ; Q1.G 1345.96,770.67 ; v1(2784.45,758.86) 2851.38,825.79 2851.38,1055.12 2931.1,1134.84 v1(2988.19,1134.84) 2988.19,1328.74 3158.46,1499.02 3158.46,2894.68 3223.43,2959.65 3310.04,3046.26 v1(3310.04,3800.2)
SHDNZ: Q2.D R9.1 U3.3 | length 514.9
  Top Layer w17.72: R9.1 v1(609.25,455.71) ; 339.57,457.68 U3.3
  Bottom Layer w17.72: v1(609.25,455.71) 610.33,454.63 Q2.D
TX232: R39.1 U13.5 | length 283
  Top Layer w10: R39.1 3119.88,2222.44 3183.46,2158.86 U13.5
U0CLK: CON6.5 U12.40 | length 1801.7
  Top Layer w10: U12.40 2874.02,3721.46 2911.42,3758.86 v1(3203.74,3758.86)
  Bottom Layer w10: CON6.5 2724.21,2686.81 3203.74,3166.34 v1(3203.74,3758.86)
U0RX: CON6.1 U12.39 | length 1774.2
  Top Layer w10: U12.39 2875.98,3682.09 2916.34,3722.44 v1(3267.72,3722.44)
  Bottom Layer w10: CON6.1 2924.21,2735.24 3267.72,3078.74 v1(3267.72,3722.44)
U0TX: CON6.3 U12.38 | length 1728.9
  Top Layer w10: U12.38 2877.95,3642.72 2916.34,3681.1 v1(3236.22,3681.1)
  Bottom Layer w10: CON6.3 2824.21,2712.01 3236.22,3124.02 v1(3236.22,3681.1)
UV_OR_WIND: Q5.S Q6.S U12.31 | length 1376.3
  Top Layer w10: Q5.S 2340.35,2981.5 Q6.S@2340.55,2981.3 ; Q6.S 2397.83,2981.5 v1(2424.21,3007.87) ; U12.31 v1(2842.52,3367.13)
  Bottom Layer w10: v1@2424.21,3008.86 2429.13,3008.86 2606.3,2831.69 2750.98,2831.69 2801.18,2881.89 2801.18,3349.41 2818.9,3367.13 v1(2842.52,3367.13)
V5: C1.1 C2.2 CON1.1 JP1.3 L1.1 U1.6 | length 2206.8
  Top Layer w40: v2(1463.58,579.72) 1463.58,303.15 CON1.1 1512.8,195.87 1539.37,169.29 1780.51,169.29 2211.61,600.39 JP1.3
  Bottom Layer w40: C1.1 1378.15,322.83 1411.02,355.71 ; v2(1463.58,579.72) 1411.02,527.17 L1.1 1411.02,355.71 ; C2.2 CON1.1@1507.44,248.58 ; CON1.1 1411.02,355.71
V6: CON4.1 JP1.1 R22.1 | length 1047.6
  Top Layer w40: JP1.1 2599.41,521.65 R22.1 2953.74,426.18 3031.5,348.43 3204.72,348.43 CON4.1
V12: C10.2 CON2.1 D1.K R9.2 U3.1 U3.2 | length 964.9
  Top Layer w20: 204.33,371.06 205.59,372.32 ; 670.28,371.06 703.64,404.43 D1.K
  Top Layer w80: 139.76,371.06 204.33,371.06 670.28,371.06 CON2.1
  Bottom Layer w40: CON2.1@670.71,204.29 CON2.1 810.59,204.72 C10.2
VBAT: C31.2 C32.2 CON3.1 CON6.17 CON6.18 CON7.1 D4.K JP2.1 JP3.1 JP4.2 JP5.1 LD2.A Q3.D R14.2 R30.2 R33.2 R34.2 R41.2 TP5.1 U12.24 U12.25 | length 218.4
  Bottom Layer w20: R14.2 941.06,3286.93 D4.K@950.39,3296.26 ; D4.K D4.K@950.39,3296.26 ; D4.K@950.79,3296.65 D4.K@950.39,3296.26 ; v2(1029.53,3296.26) D4.K@950.39,3296.26 ; R30.2 v1(1922.24,3746.06)
VBAT_BOOST: C3.2 JP5.2 R1.2 U1.9 | length 535.9
  Top Layer w12: U1.9 1574.8,551.18 1595.47,530.51
  Top Layer w20: 1595.47,530.51 1683.07,530.51 1686.02,533.46 ; R1.2 1686.02,533.46 ; C3.2 1686.02,465.12 1686.02,533.46
  Top Layer w30: R1.2 1846.73,594.37 JP5.2
VBAT_CHARGER: C11.2 C12.1 C13.2 D1.A D3.A JP2.2 R10.1 R11.2 U3.9 | length 1591.2
  Top Layer w20: D1.A 842.52,562.01 879.92,599.41 879.92,979.33
  Top Layer w40: D3.A 161.42,1260.83 213.58,1208.66 463.58,1208.66 ; 463.58,847.44 R10.1 ; C12.1 463.58,1298.23 463.58,1208.66 ; C13.2 644.25,947.83 R10.1 ; R10.1 463.58,1208.66
VBAT_HARV: JP3.2 Q4.D | length 500.9
  Top Layer w30: Q4.D@3078.19,1060.04 Q4.D@3078.19,1308.04
  Top Layer w40: Q4.D@3078.19,1308.04 JP3.2
VBAT_SENS: C26.2 C27.2 D6.K D7.K JP6.3 Q3.S R16.2 R17.2 R27.2 R31.2 R35.2 U2.7 U4.7 U7.3 U8.7 U9.3 U9.4 U10.8 U11.7 | length 8240.1
  Top Layer w20: U11.7 v2(1207.43,2155.27) ; JP6.3 922.76,1435.36 U10.8 922.76,1579.26 v1(944.88,1601.38) 1277.56,1601.38 1297.36,1621.18 C26.2 ; 922.88,1446.73 C27.2 1139.22,1446.73 1170.39,1415.56 Q3.S ; v2(1084.65,1916.34) 1084.65,1849.41 1132.38,1801.68 U9.3 1297.36,1801.14 C26.2 ; v1(1198.82,2608.27) 1392.72,2608.27 ; U4.7 1355.71,3014.17 v2(1393.7,3052.17) ; 1379.2,1700.79 U9.4 ; 1830.32,1697.83 U7.3 1830.32,1438.39 1877.95,1390.75 2447.83,1390.75 2579.72,1258.86 2579.72,1169.29 2557.48,1147.05 U2.7 ; U8.7 1973.03,1732.87 1939.96,1699.8 C26.2
  Top Layer w40: v2(1207.43,2155.27) 1393.7,2341.54 v2(1393.7,2720.47) 2468.5,2720.47 2545.28,2797.24 2819.88,2797.24 2947.83,2925.2 v2(2947.83,3032.48)
  Bottom Layer w20: R27.2 v1(944.88,1601.38) ; D7.K@1196.97,2315.83 v1(1196.97,2366.14) R17.2 ; R16.2 1196.97,2604.33 1238.19,2645.55 D6.K@1238.19,2676.18 ; D7.K 1207.43,2302.84 v2(1207.43,2155.27) ; R31.2@3016.73,3413.5 R35.2 ; R31.2 3123.03,3413.39
  Bottom Layer w40: v2(1084.65,1916.34) 1084.65,2032.48 v2(1207.43,2155.27) ; v2(1393.7,2720.47) v2(1393.7,3052.17) ; v2(2947.83,3032.48) 3123.03,3207.68 3123.03,3413.39
VDD_LDO: C17.2 C37.2 C40.2 JP4.1 JP7.1 LD3.A LD4.A R20.2 R21.2 U5.5 U13.1 U13.17 U14.14 | length 3387.3
  Top Layer w12: U13.17 v2(3233.46,1755.91) ; U13.1 C37.2@3383.46,2104.06
  Top Layer w20: R20.2 3649.72,2329.72 JP4.1
  Top Layer w40: v2@2797.24,1755.91 v2(3233.46,1755.91) ; LD3.A LD4.A 2806.1,2077.76 v2(2858.27,2025.59) ; C37.2@3391.73,2124.02 v2(3391.73,2329.72)
  Bottom Layer w20: R21.2 3750.87,2441.06 3796.26,2395.67 JP4.1 ; U5.5 3705.28,2638.39 C17.2 R21.2@3705.28,2456.38
  Bottom Layer w40: JP7.1 2853.35,1503.94 2887.8,1538.39 2887.8,1663.39 v2(2796.26,1754.92) ; v2@2773.62,1755.91 v2(2796.26,1754.92) ; v2(2858.27,2025.59) 2858.27,1816.93 v2(2796.26,1754.92) ; v2(3233.46,1755.91) 3372.05,1755.91 3391.73,1775.59 v2(3391.73,2329.72) ; 3403.54,2293.31 3759.84,2293.31 JP4.1
VDD_USB: C18.2 J1.1 R19.2 U5.1 | length 438
  Bottom Layer w20: U5.1 3704.72,2836.73 R19.2
  Bottom Layer w40: J1.1 3338.58,2837.6 3369.09,2868.11 3464.57,2868.11 3534.45,2798.23 C18.2
pads on no net: CON6.7 CON6.15 D1.NC D2.NC Designator12.1 Designator13.1 Designator14.1 Designator15.1 RAIN1. RAIN1.1 RAIN1.2 RAIN1.5 RAIN1.6 U1.8 U2.1 U2.5 U2.8 U3.8 U4.1 U4.5 U4.8 U5.4 U6.2 U6.10 U8.1 U8.5 U8.8 U9.5 U11.1 U11.5 U11.8 U12.1 U12.2 U12.3 U13.7 U13.8 U13.9 U13.14 U13.15 U13.16 WIND1. WIND1.1 WIND1.6

## Polygon pours and split planes (outlines as drawn)
VBAT on Top Layer "VBAT" (solid, remove dead copper, pour order 8): 1.97,1.97 1.97,3935.04 2258.86,3935.04 2258.86,3163.39 2732.28,3163.39 2733.27,3164.37 2733.27,3935.04 3935.04,3935.04 3935.04,1.97 1.97,1.97
GND on Bottom Layer "GND" (solid, remove dead copper, pour order 10): 1.97,1.97 1.97,3935.04 2258.86,3935.04 2258.86,3163.39 2734.25,3163.39 2734.25,3935.04 3935.04,3935.04 3935.04,1.97 1.97,1.97

## Other copper
Top Layer:
  rectangle net VDD_LDO: 2748.03,1741.14 2822.83,1773.62
  rectangle net NetC21_2: 3044.29,788.39 3095.47,875.98
  rectangle net NetR22_2: 2926.18,618.11 3036.42,642.72
  rectangle net GND: 1444.88,618.11 1514.76,666.34
  rectangle net NetR1_1: 1588.58,704.72 1678.15,726.38
  rectangle net NetC4_2: 1599.41,566.93 1644.68,591.54
  rectangle net V5: 1430.12,566.93 1521.65,596.46
  rectangle net VBAT_CHARGER: 617.13,948.27 920.28,1103.35
  rectangle net VBAT_CHARGER: 356.3,822.83 496.06,860.24
  rectangle net VBAT_CHARGER: 356.3,762.8 374.02,837.17
  rectangle net NetC9_2: 184.06,748.03 297.24,805.12
  rectangle net NetR12_2: 417.32,723.43 496.06,758.86
  rectangle net GND: 211.61,630.91 294.29,701.77
  rectangle net GND: 407.48,550.2 478.35,609.25
  rectangle net V12: 168.31,405.51 226.38,609.25
  rectangle net V12: 181.1,550.2 322.83,609.25
Bottom Layer:
  rectangle net VDD_USB: 3506.89,2731.3 3714.57,2777.56

## Silkscreen, mask and mechanical layers (free items; w line width, h text height)
Mechanical 1:
  lines w2: 0.98,0.98 3936.02,0.98 3936.02,3936.02 0.98,3936.02 0.98,0.98

## Text inside footprints (layer, text, board x,y; h text height)
CON1: Top Overlay "1" at 1504.92,333.66 h34
CON6: Top Overlay "1" at 2933.07,2821.85 h59.06 r180; Top Overlay "2" at 2942.91,2341.54 h59.06 r180; Top Overlay "20" at 2071.85,2342.52 h59.06 r180; Top Overlay "19" at 2057.09,2817.91 h59.06 r180
CON7: Top Overlay "VCC" at 3467.72,3636.57 h34; Top Overlay "GND" at 3467.72,3536.57 h34; Top Overlay "TCK" at 3467.72,3436.57 h34; Top Overlay "TDO" at 3467.72,3336.57 h34; Top Overlay "TDI" at 3467.72,3236.57 h34; Top Overlay "TMS" at 3467.72,3136.57 h34
JP1: Top Overlay "2" at 2430.67,540.39 h34 r180; Top Overlay "1" at 2525.67,540.39 h34 r180; Top Overlay "3" at 2330.67,540.39 h34 r180
JP2: Top Overlay "1" at 995.16,1001.85 h34 r180
JP3: Top Overlay "1" at 3436.1,1238.04 h34 r180
JP4: Top Overlay "1" at 3866.26,2334.72 h34 r270
JP5: Top Overlay "1" at 2014.84,587.48 h34 r180
JP7: Top Overlay "2" at 2665.91,1443.94 h34 r180; Top Overlay "1" at 2760.91,1443.94 h34 r180; Top Overlay "3" at 2565.91,1443.94 h34 r180
U7: Top Overlay "-ve" at 1737.2,1406.5 h19.68 r90; Top Overlay "+ve" at 1837.6,1406.5 h19.68 r90; Top Overlay "out" at 1787.4,1406.5 h19.68 r90